# Altium PCB classyTKL.PcbDoc (part 2 of 2)
Units mm, origin at the board's own origin, x right, y up, seen from the top; angles counter-clockwise.
Board outline 346.59 x 122.85 mm, 2 copper layers (Component Side, Bottom Layer), stack 1.571 mm thick; 202 components, 127 nets, 857 pads, 41 vias.
Unrouted connection lines stored in the file: 1.
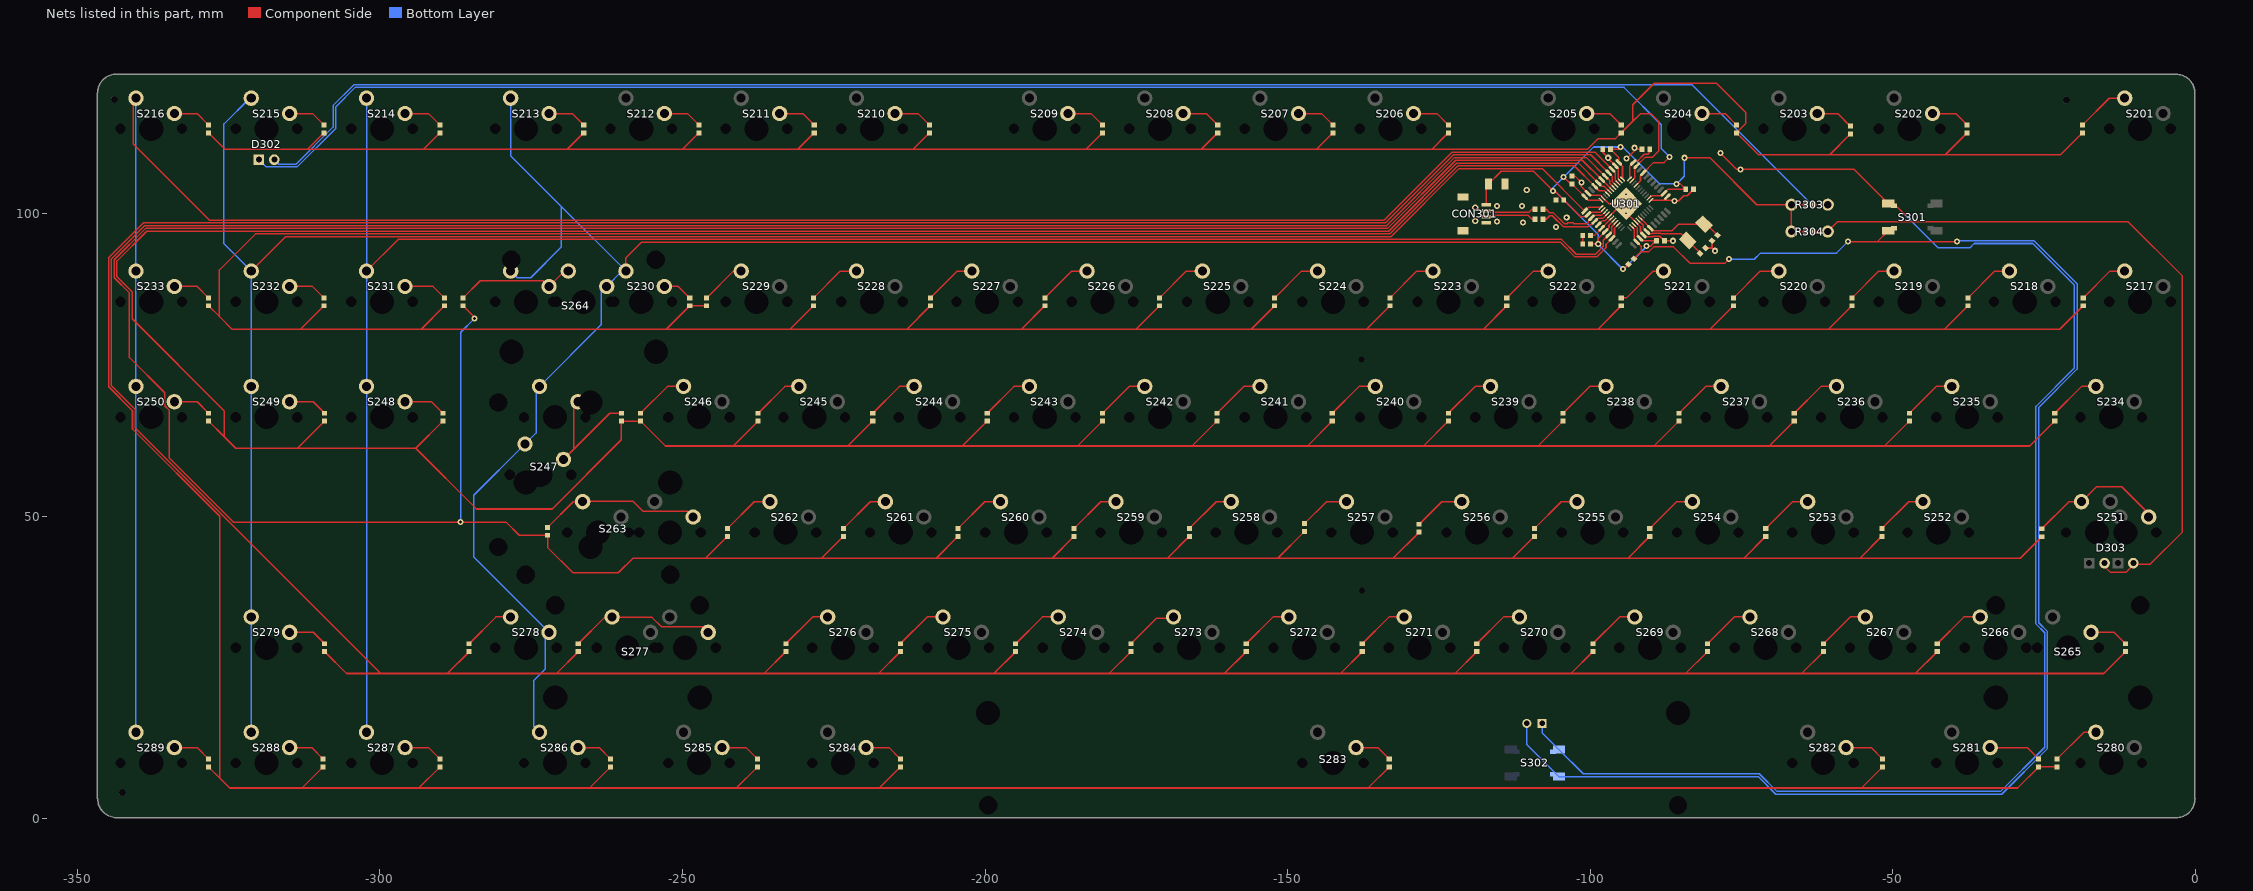
[diagram p2: the nets of this part, all layers, seen from the top]

## Via types
v1: diameter 1, hole 0.5, Component Side to Bottom Layer, tented both sides, 32 vias
v2: diameter 0.508, hole 0.254, Component Side to Bottom Layer, tented bottom, 9 vias

## Nets (pads, with @x,y where several pads share a name; then routed paths per layer and width w, separated by ;. In a path a pad name is that pad's centre, name@x,y a point inside that pad or via, vN(x,y) a via of type N, cw(c..) or ccw(c..) an arc to the next point about the centre after c; other vN are vias at no path point) (continued)
col14: S213.2 S230.2 S247.2 S264.2 S278.2 S286.2 U301.9 | length 319.2
  Component Side w0.254: S230.2@-259.34,90.495 -259.34,92.71 -256.78,95.27 -104.936,95.27 -102.506,92.84 -98.923,92.84 -97.398,94.365 -97.398,94.903 U301.9@-96.405,95.897 -95.993,96.308 -95.993,97.581 U301.9@-95.379,98.195
  Bottom Layer w0.254: S264.2@-278.39,90.495 -277.303,89.408 -275.082,89.408 -270.064,94.426 -270.064,101.219 ; S213.2@-278.39,119.07 -278.39,109.545 -270.064,101.219 ; S286.2@-273.627,14.295 -274.574,15.242 -274.574,22.86 -272.669,24.765 -272.669,30.176 S278.2@-272.04,30.805 -284.48,43.245 -284.48,53.449 S247.2@-276.009,61.92 -274.193,63.736 -274.193,70.88 S247.2@-273.627,71.445 -263.398,81.675 -263.398,87.072 S264.2@-262.515,87.955 -259.975,90.495 S230.2@-259.34,90.495 -270.064,101.219
col15: S214.2 S231.2 S248.2 S287.2 U301.8 | length 317.7
  Component Side w0.254: S231.2@-302.202,90.495 -296.973,95.724 -104.748,95.724 -102.318,93.294 -99.111,93.294 -97.917,94.488 -97.917,94.523 -97.852,94.588 -97.852,95.581 U301.8@-96.97,96.462 -96.447,96.986 -96.447,97.834 U301.8@-95.733,98.548
  Bottom Layer w0.254: S287.2@-302.202,14.295 S248.2@-302.202,71.445 S231.2@-302.202,90.495 S214.2@-302.202,119.07
col16: S215.2 S232.2 S249.2 S279.2 S288.2 U301.1 | length 341.9
  Component Side w0.254: S232.2@-321.252,90.495 -315.57,96.178 -132.93,96.178 -121.669,107.439 -107.947,107.439 U301.1@-100.93,100.422 -100.329,101.023 U301.1@-98.208,101.023
  Bottom Layer w0.254: S288.2@-321.252,14.295 S279.2@-321.252,33.345 S249.2@-321.252,71.445 S232.2@-321.252,90.495 -325.755,94.998 -325.755,114.808 -321.493,119.07 S215.2@-321.252,119.07
col17: S216.2 S233.2 S250.2 S289.2 U301.36 | length 370.6
  Component Side w0.254: S216.2@-340.302,119.07 -340.741,118.632 -340.741,111.506 -328.137,98.902 -134.058,98.902 -122.797,110.163 -99.251,110.163 U301.36@-96.405,107.316 -95.885,106.797 -95.885,105.524 U301.36@-95.379,105.018
  Bottom Layer w0.254: S289.2@-340.302,14.295 S250.2@-340.302,71.445 S233.2@-340.302,90.495 S216.2@-340.302,119.07
D_N: CON301.2 R305.2 | length 8.4
  Component Side w0.254: CON301.2@-117.156,100.455 -116.254,100.455 -115.983,100.184 -110.162,100.184 -109.635,100.711 R305.2@-109.108,100.711
D_P: CON301.3 R306.2 | length 8.4
  Component Side w0.254: CON301.3@-117.156,99.455 -116.254,99.455 -115.983,99.726 -110.301,99.726 -109.635,99.06 R306.2@-109.108,99.06
D_PRE_N: R305.1 U301.3 | length 12.5
  Component Side w0.254: R305.1@-107.808,100.711 -107.281,100.711 -106.684,100.114 -106.083,100.114 -104.267,98.298 -103.815,98.298 -103.765,98.348 -103.765,98.434 -103.715,98.484 -102.811,98.484 -102.761,98.434 -102.761,98.348 -102.711,98.298 -101.981,98.298 -100.549,98.298 -100.366,98.481 -100.366,98.724 U301.3@-99.799,99.291 -99.394,99.695 -98.122,99.695 U301.3@-97.501,100.316
D_PRE_P: R306.1 U301.4 | length 12.5
  Component Side w0.254: R306.1@-107.808,99.06 -107.281,99.06 -106.684,99.657 -106.272,99.657 -104.456,97.841 -100.36,97.841 -100.043,98.158 -99.8,98.158 U301.4@-99.233,98.725 -98.72,99.238 -97.872,99.238 U301.4@-97.147,99.962
GND: C301.1 C302.1 C303.1 C304.1 C305.1 C306.1 C307.1 C308.1 C309.1 C310.1 CON301.4 CON301.5 CON302.1 R302.2 S301.1 S302.1 U301.5 U301.15 U301.23 U301.35 U301.43 | length 289.8
  Component Side w0.254: C309.1@-102.997,106.187 -102.504,106.187 v1(-101.473,105.156) -101.473,104.465 U301.43@-100.364,103.357 -100.005,102.997 -98.308,102.997 U301.43@-97.854,102.543 -96.917,101.607 v2(-95.644,101.607) U301.43@-94.796,101.607 ; C302.1@-101.234,94.996 C301.1@-101.234,96.393 ; U301.5@-98.667,98.159 -98.043,98.784 -97.619,98.784 U301.5@-96.794,99.609 U301.43@-94.796,101.607 ; C306.1@-97.932,110.617 -97.932,110.124 v1(-97.028,109.22) -97.028,109.071 U301.35@-95.839,107.882 -95.377,107.42 -95.377,106.292 -95.407,106.262 -95.407,105.753 U301.35@-95.026,105.372 ; v1(-93.98,109.093) -92.456,110.617 R302.2@-91.455,110.617 ; U301.15@-91.207,96.462 -91.694,96.949 -91.694,97.797 U301.15@-92.445,98.548 -94.089,100.192 v2(-94.089,101.607) U301.43@-94.796,101.607 ; U301.15@-90.892,96.15 -89.683,96.15 -89.577,96.256 -88.507,96.256 -87.755,95.504 C303.1@-87.742,95.504 v1(-86.36,95.504) ; U301.23@-89.97,102.19 -87.849,102.19 ; U301.23@-87.248,102.791 -87.849,102.19 ; C305.1@-82.916,104.013 -83.986,102.943 -84.551,102.943 -85.386,102.108 v1(-86.106,102.108) -86.188,102.19 -87.849,102.19 ; C308.1@-80.947,94.313 -79.835,94.313 ; C307.1@-79.883,95.504 -79.883,94.361 -79.835,94.313 ; v1(-79.375,93.853) -79.835,94.313 ; v1(-78.486,109.982) -75.819,107.315 v1(-75.184,107.315) -56.413,107.315 S301.1@-50.759,101.661 -49.845,101.661 -48.006,99.822
  Bottom Layer w0.254: CON302.1@-107.95,15.748 -107.95,14.228 S302.1@-105.187,11.465 -101.141,7.419 -72.055,7.419 -69.154,4.518 -32.192,4.518 -24.911,11.799 -24.911,30.746 -26.362,32.197 -26.362,68.133 -20.012,74.483 -20.012,88.204 -26.864,95.056 -36.576,95.056 -37.271,94.361 -42.545,94.361 -48.006,99.822
  other v1: -105.664,97.79 -111.125,98.552 -115.443,98.679 -118.999,98.806 -103.886,99.314 -118.999,100.965 -115.443,101.219 -111.252,101.219 -110.49,103.886 -92.71,110.871
  other v2: -94.089,100.051 -94.867,100.829 -93.311,100.829 -92.533,101.607 -94.867,102.384 -93.311,102.384 -94.089,103.162
NetC301_2: C301.2 U301.6 | length 4.7
  Component Side w0.254: C301.2@-99.934,96.393 -99.302,96.393 U301.6@-98.102,97.594 -98.102,97.605 -96.452,99.255 U301.6@-96.44,99.255
NetC307_2: C307.2 U301.17 X301.2 | length 14.8
  Component Side w0.254: U301.17@-91.738,99.255 U301.17@-90.076,97.594 -89.646,97.164 -88.13,97.164 -88.121,97.155 -86.487,97.155 -85.398,98.244 X301.2@-81.206,98.244 -80.785,98.244 C307.2@-78.964,96.423
NetC308_2: C308.2 U301.16 X301.1 | length 12.8
  Component Side w0.254: U301.16@-92.091,98.902 -91.24,98.051 -91.24,97.626 U301.16@-90.642,97.028 -90.315,96.701 -89.774,96.701 -89.765,96.71 -88.319,96.71 -88.31,96.701 -85.037,96.701 X301.1@-83.894,95.557 -81.867,93.531 C308.2@-81.867,93.393
NetD201_1: D201.1 S201.1 | length 8.8
  Component Side w0.254: D201.1@-18.669,114.64 -14.239,119.07 S201.1@-11.69,119.07
NetD202_1: D202.1 S202.1 | length 6.5
  Component Side w0.254: S202.1@-43.44,116.53 -39.609,116.53 D202.1@-37.719,114.64
NetD203_1: D203.1 S203.1 | length 6.3
  Component Side w0.254: S203.1@-62.49,116.53 -59.111,116.53 D203.1@-57.023,114.442
NetD204_1: D204.1 S204.1 | length 6.5
  Component Side w0.254: S204.1@-81.54,116.53 -77.709,116.53 D204.1@-75.819,114.64
NetD205_1: D205.1 S205.1 | length 6.5
  Component Side w0.254: S205.1@-100.59,116.53 -96.759,116.53 D205.1@-94.869,114.64
NetD206_1: D206.1 S206.1 | length 6.5
  Component Side w0.254: S206.1@-129.195,116.53 -125.334,116.53 D206.1@-123.444,114.64
NetD207_1: D207.1 S207.1 | length 6.5
  Component Side w0.254: S207.1@-148.215,116.53 -144.384,116.53 D207.1@-142.494,114.64
NetD208_1: D208.1 S208.1 | length 6.5
  Component Side w0.254: S208.1@-167.265,116.53 -163.434,116.53 D208.1@-161.544,114.64
NetD209_1: D209.1 S209.1 | length 6.5
  Component Side w0.254: S209.1@-186.315,116.53 -182.484,116.53 D209.1@-180.594,114.64
NetD210_1: D210.1 S210.1 | length 6.5
  Component Side w0.254: S210.1@-214.89,116.53 -211.059,116.53 D210.1@-209.169,114.64
NetD211_1: D211.1 S211.1 | length 6.5
  Component Side w0.254: S211.1@-233.94,116.53 -230.109,116.53 D211.1@-228.219,114.64
NetD212_1: D212.1 S212.1 | length 6.5
  Component Side w0.254: S212.1@-252.99,116.53 -249.159,116.53 D212.1@-247.269,114.64
NetD213_1: D213.1 S213.1 | length 6.5
  Component Side w0.254: S213.1@-272.04,116.53 -268.209,116.53 D213.1@-266.319,114.64
NetD214_1: D214.1 S214.1 | length 6.6
  Component Side w0.254: S214.1@-295.852,116.53 -291.958,116.53 D214.1@-290.068,114.64
NetD215_1: D215.1 S215.1 | length 6.4
  Component Side w0.254: S215.1@-314.902,116.53 -311.135,116.53 D215.1@-309.245,114.64
NetD216_1: D216.1 S216.1 | length 6.4
  Component Side w0.254: S216.1@-333.952,116.53 -330.185,116.53 D216.1@-328.295,114.64
NetD217_1: D217.1 S217.1 | length 8.7
  Component Side w0.254: D217.1@-18.542,86.065 -14.112,90.495 S217.1@-11.69,90.495
NetD218_1: D218.1 S218.1 | length 8.7
  Component Side w0.254: D218.1@-37.592,86.065 -33.162,90.495 S218.1@-30.74,90.495
NetD219_1: D219.1 S219.1 | length 8.8
  Component Side w0.254: D219.1@-56.769,86.065 -52.339,90.495 S219.1@-49.79,90.495
NetD220_1: D220.1 S220.1 | length 9.3
  Component Side w0.254: D220.1@-76.327,86.065 -71.897,90.495 S220.1@-68.84,90.495
NetD221_1: D221.1 S221.1 | length 8.8
  Component Side w0.254: D221.1@-94.869,86.065 -94.021,86.065 -89.591,90.495 S221.1@-87.89,90.495
NetD222_1: D222.1 S222.1 | length 8.7
  Component Side w0.254: D222.1@-113.792,86.065 -109.362,90.495 S222.1@-106.94,90.495
NetD223_1: D223.1 S223.1 | length 8.9
  Component Side w0.254: D223.1@-133.096,86.065 -128.666,90.495 S223.1@-125.99,90.495
NetD224_1: D224.1 S224.1 | length 8.9
  Component Side w0.254: D224.1@-152.146,86.065 -147.716,90.495 S224.1@-145.04,90.495
NetD225_1: D225.1 S225.1 | length 8.9
  Component Side w0.254: D225.1@-171.196,86.065 -166.766,90.495 S225.1@-164.09,90.495
NetD226_1: D226.1 S226.1 | length 8.8
  Component Side w0.254: D226.1@-190.119,86.065 -185.689,90.495 S226.1@-183.14,90.495
NetD227_1: D227.1 S227.1 | length 8.7
  Component Side w0.254: D227.1@-209.042,86.065 -204.612,90.495 S227.1@-202.19,90.495
NetD228_1: D228.1 S228.1 | length 8.9
  Component Side w0.254: D228.1@-228.346,86.065 -223.916,90.495 S228.1@-221.24,90.495
NetD229_1: D229.1 S229.1 | length 7.5
  Component Side w0.254: D229.1@-245.999,86.065 -241.569,90.495 S229.1@-240.29,90.495
NetD230_1: D230.1 S230.1 | length 5
  Component Side w0.254: S230.1@-252.99,87.955 -250.683,87.955 D230.1@-248.793,86.065
NetD231_1: D231.1 S231.1 | length 7.3
  Component Side w0.254: S231.1@-295.852,87.955 -291.196,87.955 D231.1@-289.306,86.065
NetD232_1: D232.1 S232.1 | length 6.4
  Component Side w0.254: S232.1@-314.902,87.955 -311.135,87.955 D232.1@-309.245,86.065
NetD233_1: D233.1 S233.1 | length 6.4
  Component Side w0.254: S233.1@-333.952,87.955 -330.185,87.955 D233.1@-328.295,86.065
NetD234_1: D234.1 S234.1 | length 8.6
  Component Side w0.254: D234.1@-23.241,67.015 -18.811,71.445 S234.1@-16.452,71.445
NetD235_1: D235.1 S235.1 | length 8.8
  Component Side w0.254: D235.1@-47.244,67.015 -42.814,71.445 S235.1@-40.265,71.445
NetD236_1: D236.1 S236.1 | length 8.8
  Component Side w0.254: D236.1@-66.294,67.015 -61.864,71.445 S236.1@-59.315,71.445
NetD237_1: D237.1 S237.1 | length 8.8
  Component Side w0.254: D237.1@-85.344,67.015 -80.914,71.445 S237.1@-78.365,71.445
NetD238_1: D238.1 S238.1 | length 8.9
  Component Side w0.254: D238.1@-104.521,67.015 -100.091,71.445 S238.1@-97.415,71.445
NetD239_1: D239.1 S239.1 | length 8.8
  Component Side w0.254: D239.1@-123.444,67.015 -119.014,71.445 S239.1@-116.465,71.445
NetD240_1: D240.1 S240.1 | length 8.9
  Component Side w0.254: D240.1@-142.621,67.015 -138.191,71.445 S240.1@-135.515,71.445
NetD241_1: D241.1 S241.1 | length 8.9
  Component Side w0.254: D241.1@-161.671,67.015 -157.241,71.445 S241.1@-154.565,71.445
NetD242_1: D242.1 S242.1 | length 8.8
  Component Side w0.254: D242.1@-180.594,67.015 -176.164,71.445 S242.1@-173.615,71.445
NetD243_1: D243.1 S243.1 | length 8.8
  Component Side w0.254: D243.1@-199.644,67.015 -195.214,71.445 S243.1@-192.665,71.445
NetD244_1: D244.1 S244.1 | length 8.7
  Component Side w0.254: D244.1@-218.567,67.015 -214.137,71.445 S244.1@-211.715,71.445
NetD245_1: D245.1 S245.1 | length 8.6
  Component Side w0.254: D245.1@-237.49,67.015 -233.06,71.445 S245.1@-230.765,71.445
NetD246_1: D246.1 S246.1 | length 8.9
  Component Side w0.254: D246.1@-256.921,67.015 -252.491,71.445 S246.1@-249.815,71.445
NetD247_1: D247.1 S247.1 | length 20.8
  Component Side w0.254: S247.1@-269.659,59.38 -267.97,61.069 ; S247.1@-267.277,68.905 -267.97,68.213 -267.97,61.069 ; D247.1@-260.096,67.015 -262.024,67.015 -267.97,61.069
NetD248_1: D248.1 S248.1 | length 7.1
  Component Side w0.254: S248.1@-295.852,68.905 -291.45,68.905 D248.1@-289.56,67.015
NetD249_1: D249.1 S249.1 | length 6.6
  Component Side w0.254: S249.1@-314.902,68.905 -311.008,68.905 D249.1@-309.118,67.015
NetD250_1: D250.1 S250.1 | length 6.4
  Component Side w0.254: S250.1@-333.952,68.905 -330.185,68.905 D250.1@-328.295,67.015
NetD251_1: D251.1 S251.1 | length 22.9
  Component Side w0.254: D251.1@-25.4,47.909 -20.914,52.395 S251.1@-18.834,52.395 -16.365,54.864 -12.192,54.864 -7.721,50.393 S251.1@-7.721,49.855
NetD252_1: D252.1 S252.1 | length 8.6
  Component Side w0.254: D252.1@-51.816,47.965 -47.386,52.395 S252.1@-45.027,52.395
NetD253_1: D253.1 S253.1 | length 8.8
  Component Side w0.254: D253.1@-70.993,47.965 -66.563,52.395 S253.1@-64.077,52.395
NetD254_1: D254.1 S254.1 | length 8.9
  Component Side w0.254: D254.1@-90.17,47.965 -85.74,52.395 S254.1@-83.127,52.395
NetD255_1: D255.1 S255.1 | length 8.9
  Component Side w0.254: D255.1@-109.22,47.965 -104.79,52.395 S255.1@-102.177,52.395
NetD256_1: D256.1 S256.1 | length 9.4
  Component Side w0.254: D256.1@-128.27,48.656 -124.531,52.395 S256.1@-121.227,52.395
  Bottom Layer w0.254: S256.1@-121.793,51.83 S256.1@-121.227,52.395
NetD257_1: D257.1 S257.1 | length 8.4
  Component Side w0.254: D257.1@-147.193,48.783 -143.581,52.395 S257.1@-140.277,52.395
NetD258_1: D258.1 S258.1 | length 8.8
  Component Side w0.254: D258.1@-166.243,47.965 -161.813,52.395 S258.1@-159.327,52.395
NetD259_1: D259.1 S259.1 | length 8.8
  Component Side w0.254: D259.1@-185.293,47.965 -180.863,52.395 S259.1@-178.377,52.395
NetD260_1: D260.1 S260.1 | length 8.9
  Component Side w0.254: D260.1@-204.47,47.965 -200.04,52.395 S260.1@-197.427,52.395
NetD261_1: D261.1 S261.1 | length 8.8
  Component Side w0.254: D261.1@-223.393,47.965 -218.963,52.395 S261.1@-216.477,52.395
NetD262_1: D262.1 S262.1 | length 8.9
  Component Side w0.254: D262.1@-242.57,47.965 -238.14,52.395 S262.1@-235.527,52.395
NetD263_1: D263.1 S263.1 | length 26.9
  Component Side w0.254: D263.1@-272.288,48.148 -268.041,52.395 S263.1@-266.49,52.395 -266.434,52.451 -258.191,52.451 -256.538,50.798 -249.177,50.798 S263.1@-248.234,49.855
NetD264_1: D264.1 S264.1 | length 21
  Component Side w0.254: D264.1@-286.258,86.065 -283.425,88.898 -272.983,88.898 S264.1@-272.04,87.955 -269.5,90.495 S264.1@-268.865,90.495
  Bottom Layer w0.254: S264.1@-272.04,87.955 S264.1@-271.349,88.646
NetD265_1: D265.1 S265.1 | length 6.5
  Component Side w0.254: S265.1@-17.246,30.805 -13.447,30.805 D265.1@-11.557,28.915
NetD266_1: D266.1 S266.1 | length 8.9
  Component Side w0.254: D266.1@-42.672,28.915 -38.242,33.345 S266.1@-35.56,33.345
NetD267_1: D267.1 S267.1 | length 8.8
  Component Side w0.254: D267.1@-61.468,28.915 -57.038,33.345 S267.1@-54.552,33.345
NetD268_1: D268.1 S268.1 | length 8.9
  Component Side w0.254: D268.1@-80.645,28.915 -76.215,33.345 S268.1@-73.602,33.345
NetD269_1: D269.1 S269.1 | length 8.8
  Component Side w0.254: D269.1@-99.568,28.915 -95.138,33.345 S269.1@-92.652,33.345
NetD270_1: D270.1 S270.1 | length 8.9
  Component Side w0.254: D270.1@-118.745,28.915 -114.315,33.345 S270.1@-111.702,33.345
NetD271_1: D271.1 S271.1 | length 8.8
  Component Side w0.254: D271.1@-137.668,28.915 -133.238,33.345 S271.1@-130.752,33.345
NetD272_1: D272.1 S272.1 | length 8.9
  Component Side w0.254: D272.1@-156.845,28.915 -152.415,33.345 S272.1@-149.802,33.345
NetD273_1: D273.1 S273.1 | length 9
  Component Side w0.254: D273.1@-175.895,28.915 -171.663,33.147 -168.91,33.147 -168.852,33.205 S273.1@-168.852,33.345
NetD274_1: D274.1 S274.1 | length 8.9
  Component Side w0.254: D274.1@-194.945,28.915 -190.515,33.345 S274.1@-187.902,33.345
NetD275_1: D275.1 S275.1 | length 8.9
  Component Side w0.254: D275.1@-213.995,28.915 -209.565,33.345 S275.1@-206.952,33.345
NetD276_1: D276.1 S276.1 | length 8.8
  Component Side w0.254: D276.1@-232.918,28.915 -228.488,33.345 S276.1@-226.002,33.345
NetD277_1: D277.1 S277.1 | length 24.4
  Component Side w0.254: D277.1@-267.208,28.915 -262.778,33.345 S277.1@-261.62,33.345 -261.549,33.274 -255.016,33.274 -253.49,31.748 -246.688,31.748 S277.1@-245.745,30.805
NetD278_1: D278.1 S278.1 | length 8.7
  Component Side w0.254: D278.1@-285.242,28.915 -280.812,33.345 S278.1@-278.39,33.345
NetD279_1: D279.1 S279.1 | length 6.6
  Component Side w0.254: S279.1@-314.902,30.805 -311.008,30.805 D279.1@-309.118,28.915
NetD280_1: D280.1 S280.1 | length 8.2
  Component Side w0.254: D280.1@-22.86,9.865 -18.43,14.295 S280.1@-16.452,14.295
NetD281_1: D281.1 S281.1 | length 8.8
  Component Side w0.254: S281.1@-33.914,11.755 -27.798,11.755 D281.1@-25.908,9.865
NetD282_1: D282.1 S282.1 | length 6.8
  Component Side w0.254: S282.1@-57.727,11.755 -53.579,11.755 D282.1@-51.689,9.865
NetD283_1: D283.1 S283.1 | length 6.2
  Component Side w0.254: S283.1@-138.689,11.755 -135.113,11.755 D283.1@-133.223,9.865
NetD284_1: D284.1 S284.1 | length 6.4
  Component Side w0.254: S284.1@-219.652,11.755 -215.885,11.755 D284.1@-213.995,9.865
NetD285_1: D285.1 S285.1 | length 6.6
  Component Side w0.254: S285.1@-243.464,11.755 -239.507,11.755 D285.1@-237.617,9.865
NetD286_1: D286.1 S286.1 | length 6.2
  Component Side w0.254: S286.1@-267.277,11.755 -263.764,11.755 D286.1@-261.874,9.865
NetD287_1: D287.1 S287.1 | length 6.6
  Component Side w0.254: S287.1@-295.852,11.755 -291.958,11.755 D287.1@-290.068,9.865
NetD288_1: D288.1 S288.1 | length 6.3
  Component Side w0.254: S288.1@-314.902,11.755 -311.262,11.755 D288.1@-309.372,9.865
NetD289_1: D289.1 S289.1 | length 6.4
  Component Side w0.254: S289.1@-333.952,11.755 -330.185,11.755 D289.1@-328.295,9.865
NetD302_1: D302.1 R303.2 | length 275.1
  Component Side w0.254: R303.2@-63.104,101.473 R303.2@-60.754,101.473
  Bottom Layer w0.254: D302.1@-317.442,108.91 -316.694,108.162 -313.859,108.162 -307.721,114.3 -307.721,117.856 -304.286,121.291 -83.191,121.291 -63.373,101.473 R303.2@-60.754,101.473
NetD303_1: D303.1 R304.2 | length 124.5
  Component Side w0.254: R304.2@-63.104,97.028 R304.2@-60.754,97.028 -59.103,98.679 -11.176,98.679 -2.159,89.662 -2.159,47.371 -7.493,42.037 -10.064,42.037 D303.1@-10.262,42.235 -10.262,41.935 -11.43,40.767 -14.097,40.767 -15.024,41.694 D303.1@-15.024,42.235
NetR302_1: R302.1 U301.33 | length 7.1
  Component Side w0.254: U301.33@-93.505,105.725 -93.505,107.847 U301.33@-92.904,108.448 -92.589,108.448 -92.589,108.76 -92.103,108.76 -91.078,109.785 -90.494,109.785 -90.155,110.124 R302.1@-90.155,110.617
PC7: D201.2 D202.2 D203.2 D204.2 D205.2 D206.2 D207.2 D208.2 D209.2 D210.2 D211.2 D212.2 D213.2 D214.2 D215.2 D216.2 U301.32 | length 393.6
  Component Side w0.254: D216.2@-328.295,113.34 -325.572,110.617 -311.968,110.617 ; D215.2@-309.245,113.34 -311.968,110.617 ; D214.2@-290.068,113.34 -292.791,110.617 ; D213.2@-266.319,113.34 -269.042,110.617 ; D212.2@-247.269,113.34 -249.992,110.617 ; D211.2@-228.219,113.34 -230.942,110.617 ; D210.2@-209.169,113.34 -211.892,110.617 ; D209.2@-180.594,113.34 -183.317,110.617 ; D208.2@-161.544,113.34 -164.267,110.617 ; D207.2@-142.494,113.34 -145.217,110.617 ; D206.2@-123.444,113.34 -126.167,110.617 ; U301.32@-93.152,105.372 -92.656,105.868 -92.656,107.565 U301.32@-92.339,107.882 -90.89,109.331 -89.678,109.331 -88.646,110.363 -88.646,115.189 -89.916,116.459 -91.75,116.459 -92.964,115.245 ; D203.2@-57.023,113.142 -60.437,109.728 ; D202.2@-37.719,113.34 -41.331,109.728 ; D201.2@-18.669,113.34 -22.281,109.728 -41.331,109.728 ; -311.968,110.617 -292.791,110.617 ; -292.791,110.617 -269.042,110.617 ; -269.042,110.617 -249.992,110.617 ; -249.992,110.617 -230.942,110.617 ; -230.942,110.617 -211.892,110.617 ; -211.892,110.617 -183.317,110.617 ; -183.317,110.617 -164.267,110.617 ; -164.267,110.617 -145.217,110.617 ; -145.217,110.617 -126.167,110.617 ; -126.167,110.617 -100.457,110.617 -98.679,112.395 -95.814,112.395 D205.2@-94.869,113.34 -92.964,115.245 ; -92.964,115.245 -92.964,117.983 -89.408,121.539 -79.121,121.539 -74.295,116.713 -74.295,114.864 D204.2@-75.819,113.34 -72.207,109.728 -60.437,109.728 ; -60.437,109.728 -41.331,109.728
PF0: D217.2 D218.2 D219.2 D220.2 D221.2 D222.2 D223.2 D224.2 D225.2 D226.2 D227.2 D228.2 D229.2 D230.2 D231.2 D232.2 D233.2 U301.41 | length 638.4
  Component Side w0.254: D233.2@-328.295,84.765 -326.517,82.987 ; D232.2@-309.245,84.765 -313.111,80.899 ; D231.2@-289.306,84.765 -293.172,80.899 ; D229.2@-245.999,84.765 D230.2@-248.793,84.765 -252.659,80.899 ; D228.2@-228.346,84.765 -232.212,80.899 ; D227.2@-209.042,84.765 -212.908,80.899 ; D226.2@-190.119,84.765 -193.985,80.899 ; D225.2@-171.196,84.765 -175.062,80.899 ; D224.2@-152.146,84.765 -156.012,80.899 ; D223.2@-133.096,84.765 -136.962,80.899 ; D222.2@-113.792,84.765 -117.658,80.899 ; U301.41@-97.147,103.251 -97.656,103.759 -98.504,103.759 U301.41@-99.233,104.488 -102.638,107.893 -121.857,107.893 -133.118,96.632 -320.563,96.632 -326.517,90.678 -326.517,82.987 ; D221.2@-94.869,84.765 -98.735,80.899 ; D220.2@-76.327,84.765 -80.193,80.899 ; D219.2@-56.769,84.765 -60.635,80.899 ; D218.2@-37.592,84.765 -41.458,80.899 ; D217.2@-18.542,84.765 -22.408,80.899 -41.458,80.899 ; -326.517,82.987 -324.429,80.899 -313.111,80.899 ; -313.111,80.899 -293.172,80.899 ; -293.172,80.899 -252.659,80.899 ; -252.659,80.899 -232.212,80.899 ; -232.212,80.899 -212.908,80.899 ; -212.908,80.899 -193.985,80.899 ; -193.985,80.899 -175.062,80.899 ; -175.062,80.899 -156.012,80.899 ; -156.012,80.899 -136.962,80.899 ; -136.962,80.899 -117.658,80.899 ; -117.658,80.899 -98.735,80.899 ; -98.735,80.899 -80.193,80.899 ; -80.193,80.899 -60.635,80.899 ; -60.635,80.899 -41.458,80.899
PF1: D234.2 D235.2 D236.2 D237.2 D238.2 D239.2 D240.2 D241.2 D242.2 D243.2 D244.2 D245.2 D246.2 D247.2 D248.2 D249.2 D250.2 U301.40 | length 690.9
  Component Side w0.254: D250.2@-328.295,65.715 -325.699,63.119 ; D249.2@-309.118,65.715 -313.619,61.214 ; D248.2@-289.56,65.715 -294.061,61.214 ; D245.2@-237.49,65.715 -241.61,61.595 ; D244.2@-218.567,65.715 -222.687,61.595 ; D243.2@-199.644,65.715 -203.764,61.595 ; D242.2@-180.594,65.715 -184.714,61.595 ; D241.2@-161.671,65.715 -165.791,61.595 ; D240.2@-142.621,65.715 -146.741,61.595 ; D239.2@-123.444,65.715 -127.564,61.595 ; D238.2@-104.521,65.715 -108.641,61.595 ; U301.40@-96.794,103.604 -97.71,104.521 -98.135,104.521 U301.40@-98.667,105.054 -101.961,108.347 -122.045,108.347 -133.306,97.086 -338.524,97.086 -343.443,92.167 -343.443,89.577 -340.922,87.056 -340.922,82.604 -325.699,67.381 -325.699,63.119 ; D237.2@-85.344,65.715 -89.464,61.595 ; D236.2@-66.294,65.715 -70.414,61.595 ; D235.2@-47.244,65.715 -51.364,61.595 ; D234.2@-23.241,65.715 -27.361,61.595 -51.364,61.595 ; -325.699,63.119 -323.794,61.214 -313.619,61.214 ; -313.619,61.214 -294.061,61.214 ; -294.061,61.214 -284.028,51.181 -271.526,51.181 -260.096,62.611 D247.2@-260.096,65.715 D246.2@-256.921,65.715 -252.801,61.595 -241.61,61.595 ; -241.61,61.595 -222.687,61.595 ; -222.687,61.595 -203.764,61.595 ; -203.764,61.595 -184.714,61.595 ; -184.714,61.595 -165.791,61.595 ; -165.791,61.595 -146.741,61.595 ; -146.741,61.595 -127.564,61.595 ; -127.564,61.595 -108.641,61.595 ; -108.641,61.595 -89.464,61.595 ; -89.464,61.595 -70.414,61.595 ; -70.414,61.595 -51.364,61.595
PF4: D251.2 D252.2 D253.2 D254.2 D255.2 D256.2 D257.2 D258.2 D259.2 D260.2 D261.2 D262.2 D263.2 D264.2 U301.39 | length 709.7
  Component Side w0.254: D264.2@-286.258,84.765 -284.261,82.769 -284.226,82.733 v1@-284.226,82.677 ; D262.2@-242.57,46.665 -246.182,43.053 ; D261.2@-223.393,46.665 -227.005,43.053 ; D260.2@-204.47,46.665 -208.082,43.053 ; D259.2@-185.293,46.665 -188.905,43.053 ; D258.2@-166.243,46.665 -169.855,43.053 ; D257.2@-147.193,47.483 -151.623,43.053 ; D256.2@-128.27,47.356 -132.573,43.053 ; D255.2@-109.22,46.665 -112.832,43.053 ; U301.39@-98.102,105.619 U301.39@-96.44,103.958 ; U301.39@-98.044,105.537 -98.114,105.607 -101.308,108.801 -122.233,108.801 -133.494,97.54 -338.712,97.54 -343.897,92.355 -343.897,89.389 -341.376,86.868 -341.376,76.2 -335.549,70.373 -335.549,68.244 -334.772,67.466 -334.772,59.57 -324.224,49.022 v1(-286.639,49.022) -279.146,49.022 -276.972,46.848 D263.2@-272.288,46.848 -272.288,44.831 -268.097,40.64 -260.604,40.64 -258.191,43.053 -246.182,43.053 ; D254.2@-90.17,46.665 -93.782,43.053 ; D253.2@-70.993,46.665 -74.605,43.053 ; D252.2@-51.816,46.665 -55.428,43.053 ; D251.2@-25.4,46.609 -28.956,43.053 -55.428,43.053 ; -246.182,43.053 -227.005,43.053 ; -227.005,43.053 -208.082,43.053 ; -208.082,43.053 -188.905,43.053 ; -188.905,43.053 -169.855,43.053 ; -169.855,43.053 -151.623,43.053 ; -151.623,43.053 -132.573,43.053 ; -132.573,43.053 -112.832,43.053 ; -112.832,43.053 -93.782,43.053 ; -93.782,43.053 -74.605,43.053 ; -74.605,43.053 -55.428,43.053
  Bottom Layer w0.254: v1@-286.639,48.96 v1(-286.639,49.022) -286.639,80.391 v1(-284.353,82.677)
PF5: D265.2 D266.2 D267.2 D268.2 D269.2 D270.2 D271.2 D272.2 D273.2 D274.2 D275.2 D276.2 D277.2 D278.2 D279.2 U301.38 | length 711.4
  Component Side w0.254: D279.2@-309.118,27.615 -305.506,24.003 -299.847,24.003 ; D278.2@-285.242,27.615 -288.854,24.003 ; D277.2@-267.208,27.615 -270.82,24.003 ; D276.2@-232.918,27.615 -236.53,24.003 ; D275.2@-213.995,27.615 -217.607,24.003 ; D274.2@-194.945,27.615 -198.557,24.003 ; D273.2@-175.895,27.615 -179.507,24.003 ; D272.2@-156.845,27.615 -160.457,24.003 ; D271.2@-137.668,27.615 -141.28,24.003 ; D270.2@-118.745,27.615 -122.357,24.003 ; D269.2@-99.568,27.615 -103.18,24.003 ; U301.38@-97.536,106.172 -97.543,106.179 -100.619,109.255 -122.421,109.255 -133.682,97.994 -338.9,97.994 -344.351,92.543 -344.351,71.562 -340.414,67.625 -340.414,64.57 -299.847,24.003 ; U301.38@-97.536,106.185 -96.793,105.442 -96.793,105.018 U301.38@-96.086,104.311 ; D268.2@-80.645,27.615 -84.257,24.003 ; D267.2@-61.468,27.615 -65.08,24.003 ; D266.2@-42.672,27.615 -46.284,24.003 ; D265.2@-11.557,27.615 -15.169,24.003 -46.284,24.003 ; -299.847,24.003 -288.854,24.003 ; -288.854,24.003 -270.82,24.003 ; -270.82,24.003 -236.53,24.003 ; -236.53,24.003 -217.607,24.003 ; -217.607,24.003 -198.557,24.003 ; -198.557,24.003 -179.507,24.003 ; -179.507,24.003 -160.457,24.003 ; -160.457,24.003 -141.28,24.003 ; -141.28,24.003 -122.357,24.003 ; -122.357,24.003 -103.18,24.003 ; -103.18,24.003 -84.257,24.003 ; -84.257,24.003 -65.08,24.003 ; -65.08,24.003 -46.284,24.003
PF6: D280.2 D281.2 D282.2 D283.2 D284.2 D285.2 D286.2 D287.2 D288.2 D289.2 U301.37 | length 695.1
  Component Side w0.254: D289.2@-328.295,8.565 -326.461,6.731 ; D288.2@-309.372,8.565 -312.857,5.08 ; D287.2@-290.068,8.565 -293.553,5.08 ; D286.2@-261.874,8.565 -265.359,5.08 ; D285.2@-237.617,8.565 -241.102,5.08 ; D284.2@-213.995,8.565 -217.48,5.08 ; D283.2@-133.223,8.565 -136.708,5.08 ; U301.37@-95.733,104.665 -96.339,105.271 -96.339,106.119 U301.37@-96.97,106.751 -99.929,109.709 -122.609,109.709 -133.87,98.448 -339.088,98.448 -344.805,92.731 -344.805,71.374 -340.868,67.437 -340.868,64.382 -326.461,49.975 -326.461,6.731 ; D282.2@-51.689,8.565 -55.174,5.08 ; D280.2@-22.86,8.565 D281.2@-25.908,8.565 -29.393,5.08 -55.174,5.08 ; -326.461,6.731 -324.81,5.08 -312.857,5.08 ; -312.857,5.08 -293.553,5.08 ; -293.553,5.08 -265.359,5.08 ; -265.359,5.08 -241.102,5.08 ; -241.102,5.08 -217.48,5.08 ; -217.48,5.08 -136.708,5.08 ; -136.708,5.08 -55.174,5.08
RAW: C302.2 C303.2 C304.2 C305.2 C306.2 C309.2 C310.2 CON301.1 R301.1 R303.1 R304.1 U301.2 U301.7 U301.14 U301.24 U301.34 U301.44 | length 150.4
  Component Side w0.254: CON301.1@-117.156,101.455 -117.156,104.539 C304.2@-116.793,104.902 -114.71,106.985 -109.398,106.985 v1(-106.172,103.759) ; v1@-106.038,103.894 C310.2@-104.379,102.235 -101.585,99.441 -100.78,99.441 U301.2@-100.364,99.856 -100.018,100.203 -98.321,100.203 U301.2@-97.854,100.67 ; v1(-104.394,106.045) -103.236,104.887 C309.2@-102.997,104.887 -100.93,102.82 U301.44@-100.93,102.791 -100.329,102.19 U301.44@-98.208,102.19 ; C302.2@-99.934,94.996 v1(-98.679,94.996) -98.679,95.885 U301.7@-97.536,97.028 -96.901,97.663 -96.901,98.087 U301.7@-96.086,98.902 ; v1(-94.996,110.998) -95.377,110.617 C306.2@-96.632,110.617 -95.273,109.258 U301.34@-95.273,108.448 -94.672,107.847 U301.34@-94.672,105.725 ; v1(-94.615,90.805) -94.488,90.805 R301.1@-93.678,91.615 ; U301.14@-92.798,98.195 -92.202,97.598 -92.202,96.326 U301.14@-91.773,95.897 -91.38,95.504 C303.2@-89.161,95.504 ; v1(-90.678,94.615) -90.05,94.615 C303.2@-89.161,95.504 ; U301.24@-90.324,102.543 -89.942,102.925 -88.245,102.925 U301.24@-87.813,103.357 -87.157,104.013 C305.2@-84.216,104.013 -85.105,104.902 v1(-85.725,104.902) ; C303.2@-89.042,95.504 C303.2@-89.161,95.504 ; v1(-84.455,109.22) -80.229,109.22 -72.482,101.473 R303.1@-66.754,101.473 ; R304.1@-64.404,97.028 R304.1@-66.754,97.028 R303.1@-66.754,101.473 ; R303.1@-64.404,101.473 R303.1@-66.754,101.473
  Bottom Layer w0.254: v1(-90.678,94.615) -94.488,90.805 v1(-94.615,90.805) -98.679,94.869 v1(-98.679,94.996) -98.679,96.535 -105.903,103.759 v1(-106.172,103.759) -106.172,104.267 v1(-104.394,106.045) -99.441,110.998 v1(-94.996,110.998) -94.615,110.998 -88.519,104.902 v1(-85.725,104.902) -84.455,106.172 v1(-84.455,109.22)
RST: CON302.2 R301.2 S301.2 S302.2 U301.13 | length 262.9
  Component Side w0.254: U301.13@-93.152,97.841 -92.71,97.399 -92.71,95.702 U301.13@-92.339,95.331 -91.567,94.559 -91.567,93.726 ; R301.2@-92.758,92.535 -91.567,93.726 ; v1(-77.089,92.456) -77.723,91.822 -83.567,91.822 -86.233,94.488 -89.535,94.488 -90.297,93.726 -91.567,93.726 ; v1(-57.404,95.377) -52.543,95.377 ; S301.2@-50.759,97.161 -52.543,95.377 ; v1(-39.37,95.377) -52.543,95.377
  Bottom Layer w0.254: CON302.2@-110.49,15.748 -110.49,12.268 S302.2@-105.187,6.965 -72.243,6.965 -69.342,4.064 -32.004,4.064 -24.457,11.611 -24.457,30.934 -25.908,32.385 -25.908,67.945 -19.558,74.295 -19.558,88.392 -26.676,95.51 -39.237,95.51 v1(-39.37,95.377) ; v1(-77.089,92.456) -72.898,92.456 -71.882,93.472 -59.309,93.472 v1(-57.404,95.377)
scroll_led: D302.2 U301.30 | length 256.2
  Component Side w0.254: U301.30@-92.445,104.665 -91.7,105.41 -91.694,105.41 -91.694,106.264 U301.30@-91.207,106.751 -89.535,108.423 -87.792,108.423 v1(-86.868,109.347)
  Bottom Layer w0.254: D302.2@-319.982,108.91 -318.78,107.708 -313.671,107.708 -307.267,114.112 -307.267,117.668 -304.098,120.837 -94.421,120.837 -88.265,114.681 -88.265,110.744 v1(-86.868,109.347)
pads on no net: D302. D303. S201. S202. S203. S204. S205. S206. S207. S208. S209. S210. S211. S212. S213. S214. S215. S216. S217. S218. S219. S220. S221. S222. S223. S224. S225. S226. S227. S228. S229. S230. S231. S232. S233. S234. S235. S236. S237. S238. S239. S240. S241. S242. S243. S244. S245. S246. S247. S248. S249. S250. S251. S252. S253. S254. S255. S256. S257. S258. S259. S260. S261. S262. S263. S264. S265. S266. S267. S268. S269. S270. S271. S272. S273. S274. S275. S276. S277. S278. S279. S280. S281. S282. S283. S284. S285. S286. S287. S288. S289. S301. S302. U301.42

## Polygon pours and split planes (outlines as drawn)
GND on Component Side "Component Side-No Net" (solid, pour order 4): -89.97,104.902 -89.97,96.139 -122.682,96.139 -122.682,104.902
GND on Bottom Layer "Component Side-No Net" (solid, pour order 0): -73.914,112.268 -73.914,90.932 -122.682,90.932 -122.682,112.268

## Other copper
Component Side:
  pour cut-out: 2.567,4.117 ccw(c1.067,4.117) -0.434,4.117 cw(c-3.933,4.117) -3.933,0.617 ccw(c-3.933,-0.883) -5.434,-0.883 ccw(c-3.933,-0.883) -3.933,-2.384 ccw(c-3.933,4.117)
  pour cut-out: -349.353,118.996 ccw(c-347.852,118.996) -346.352,118.996 cw(c-342.852,118.996) -342.852,122.495 ccw(c-342.852,123.996) -341.352,123.996 ccw(c-342.852,123.996) -342.852,125.496 ccw(c-342.852,118.996)
  pour cut-out: -342.758,-2.492 ccw(c-342.758,-0.992) -342.758,0.509 cw(c-342.758,4.008) -346.258,4.008 ccw(c-347.758,4.008) -347.758,5.509 ccw(c-347.758,4.008) -349.259,4.008 ccw(c-342.758,4.008)
Bottom Layer:
  pour cut-out: 2.551,4.063 ccw(c1.051,4.063) -0.449,4.063 cw(c-3.949,4.063) -3.949,0.563 ccw(c-3.949,-0.937) -5.449,-0.937 ccw(c-3.949,-0.937) -3.949,-2.437 ccw(c-3.949,4.063)
  pour cut-out: -349.377,119.035 ccw(c-347.876,119.035) -346.376,119.035 cw(c-342.876,119.035) -342.876,122.535 ccw(c-342.876,124.035) -341.376,124.035 ccw(c-342.876,124.035) -342.876,125.536 ccw(c-342.876,119.035)
  pour cut-out: -342.812,-2.464 ccw(c-342.812,-0.964) -342.812,0.537 cw(c-342.812,4.036) -346.311,4.036 ccw(c-347.812,4.036) -347.812,5.537 ccw(c-347.812,4.036) -349.312,4.036 ccw(c-342.812,4.036)
  pour cut-out: -77.364,115.375 ccw(c-77.364,113.875) -77.364,112.374 cw(c-77.364,108.875) -73.865,108.875 ccw(c-72.364,108.875) -72.364,107.374 ccw(c-72.364,108.875) -70.864,108.875 ccw(c-77.364,108.875)
  pour cut-out: -70.909,94.412 ccw(c-72.409,94.412) -73.91,94.412 cw(c-77.409,94.412) -77.409,90.913 ccw(c-77.409,89.412) -78.91,89.412 ccw(c-77.409,89.412) -77.409,87.912 ccw(c-77.409,94.412)
  pour cut-out: -119.232,87.825 ccw(c-119.232,89.325) -119.232,90.826 cw(c-119.232,94.325) -122.731,94.325 ccw(c-124.232,94.325) -124.232,95.826 ccw(c-124.232,94.325) -125.732,94.325 ccw(c-119.232,94.325)
  pour cut-out: -125.731,108.737 ccw(c-124.231,108.737) -122.73,108.737 cw(c-119.231,108.737) -119.231,112.236 ccw(c-119.231,113.737) -117.73,113.737 ccw(c-119.231,113.737) -119.231,115.237 ccw(c-119.231,108.737)

## Silkscreen, mask and mechanical layers (free items; w line width, h text height)
Top Overlay:
  lines w0.254: -68.58,99.695 -68.58,95.123 -54.102,95.123 -54.102,99.695 ; -68.58,99.695 -68.58,104.013 -54.102,104.013 -54.102,99.695 ; -68.58,99.695 -54.102,99.695
  text "SCROLL" at -59.055,100.965 h0.75
  text "CAPS" at -58.547,96.647 h0.75
  text "RESET" at -48.387,94.996 h0.75
  text "RESET" at -110.998,13.208 h0.75
  text "classyTKL" at -189.992,10.033 h9
  text "PCB by 4pplet" at -190.119,6.35 h3
  text "Rev A1" at -161.925,6.223 h3
Bottom Overlay:
  lines w0.2: -111.76,14.478 -111.76,17.018 -106.68,17.018 -106.68,14.478 -111.76,14.478
  text "CON302" at -107.188,17.526 h0.75
  text "RESET" at -107.442,4.699 h0.75
outline:
  lines w0.203: -195.49,94.615 -195.484,94.608
  lines w0.254: -346.531,3.319 -346.531,119.9 cw(c-343.532,119.9) -343.532,122.9 ; -346.5,3.319 ccw(c-343.5,3.319) -343.5,0.319 -3.2,0.319 ; -343.532,122.886 -3.204,122.886 cw(c-3.204,119.886) -0.204,119.886 -0.204,3.3 ; -3.2,0.3 ccw(c-3.2,3.3) -0.2,3.3